# Altium PCB 2MB_RAM_CARD.pcbdoc (part 2 of 2)
Units mil, origin at the board's own origin, x right, y up, seen from the top; angles counter-clockwise.
Board outline 12033.6 x 7458.81 mil, 2 copper layers (Top Layer, Bottom Layer); 77 components, 241 nets, 875 pads, 126 vias.
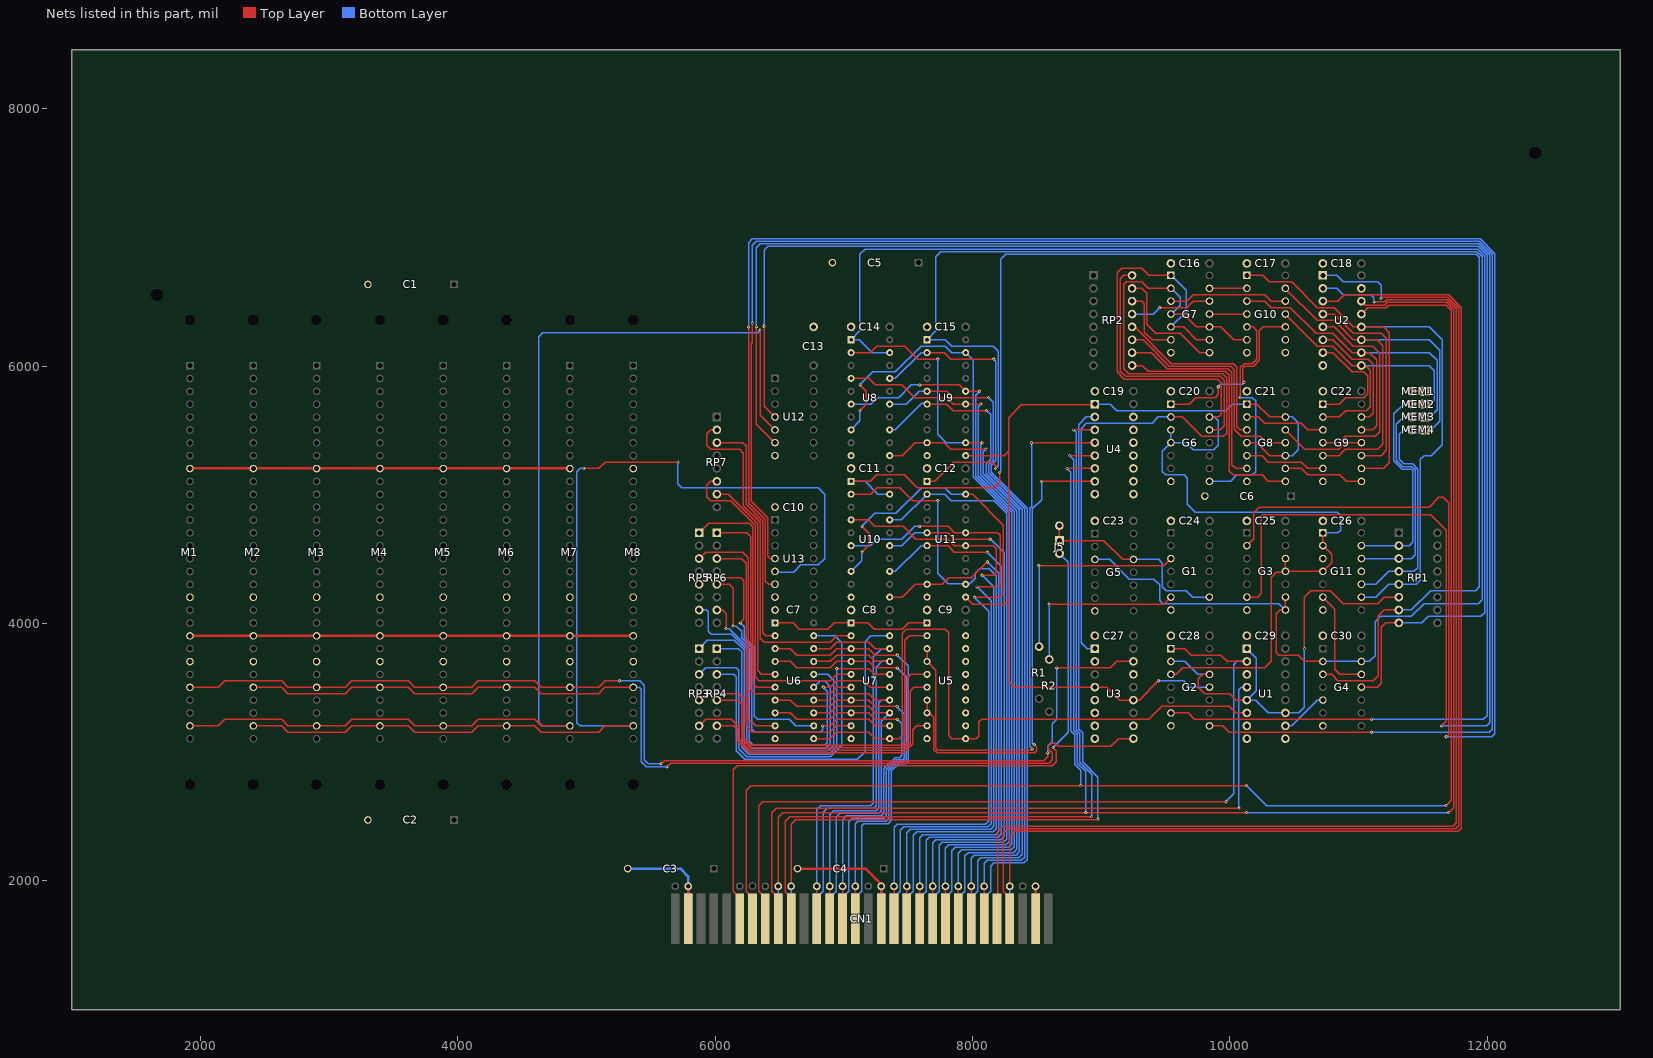
[diagram p2: the nets of this part, all layers, seen from the top]

## Via types
v1: diameter 24, hole 12, Top Layer to Bottom Layer, tented both sides, 126 vias

## Nets (pads, with @x,y where several pads share a name; then routed paths per layer and width w, separated by ;. In a path a pad name is that pad's centre, name@x,y a point inside that pad or via, vN(x,y) a via of type N, cw(c..) or ccw(c..) an arc to the next point about the centre after c; other vN are vias at no path point) (continued)
G7_1: G2.3 G3.11 G3.12 G6.3 G6.4 G6.13 G7.1 G7.5 G7.9 G11.1 G11.2 G11.4 | length 8540.4
  Top Layer w10: G7.5@9541.83,6305.2 9640,6305.19 9740,6205.19 G7.9@9841.83,6205.2 ; G7.1@9541.83,6705.2 9370,6705.19 9315,6760.19 9160,6760.19 9125,6725.19 9125,5955.19 9180,5900.19 9905,5900.19 9935,5870.19 9935,5625.19 9915,5605.19 G6.13@9841.83,5605.2 ; G2.3@9541.8,3605.2 9585,3605.2 9635,3655.2 10270,3655.2 10320,3705.2 10320,4360.19 10360,4400.19 10430.54,4400.19 G3.11@10432.43,4405.2 ; G3.12@10432.43,4498.31 G3.11@10432.43,4405.2 ; G11.1@10722.3,4705.19 G11.2@10722.3,4605.19 10725,4605.19 10790,4540.19 10790,4472.9 G11.4@10722.3,4405.19 10439.32,4405.19 G3.11@10432.43,4405.2
  Bottom Layer w10: G7.5@9541.83,6305.2 9660,6423.4 9660,6590.19 9545,6705.19 G7.1@9541.83,6705.2 ; G6.4@9541.83,5405.2 G6.3@9541.83,5505.2 ; G6.13@9841.83,5605.2 9880,5605.19 9910,5575.19 9910,5385.19 9875,5350.19 9725,5350.19 9715,5350.19 9710,5355.19 9660,5405.19 G6.4@9541.83,5405.2 9475,5338.4 9475,5180.19 9500,5155.19 9645,5155.19 9670,5130.19 9670,4925.19 9730,4865.19 10835,4865.19 10860,4840.19 10860,4725.19 10840,4705.19 G11.1@10722.3,4705.19
G7_2: G6.2 G7.2 G7.4 G7.10 G10.6 U3.1 | length 6276
  Top Layer w10: G6.2@9541.83,5605.2 9630,5605.19 9780,5455.19 9950,5455.19 9975,5480.19 9975,5910.19 9945,5940.19 9215,5940.19 9175,5980.19 9175,6635.19 9195,6655.19 9315,6655.19 9365,6605.19 G7.2@9541.83,6605.2 ; G7.4@9541.83,6405.2 9640,6405.19 9740,6305.19 G7.10@9841.83,6305.2 9930,6305.19 10030,6205.19 G10.6@10131.8,6205.19
  Bottom Layer w10: U3.1@8950.61,3805.23 8889.96,3805.24 8845,3850.2 8845,5515.19 8885,5555.19 9395,5555.19 9445,5605.19 G6.2@9541.83,5605.2 ; G7.4@9541.83,6405.2 9545.03,6405.23 9615,6475.19 9615,6480.19 9615,6535.19 9544.97,6605.23 G7.2@9541.83,6605.2
G7_3: G7.3 G10.12 | length 931.4
  Top Layer w10: G7.3@9541.83,6505.2 9665,6505.19 9715,6555.19 10270,6555.19 10320,6505.19 G10.12@10431.8,6505.19
G7_6: G7.6 RP2.14 | length 554.9
  Top Layer w10: RP2.14@9240.01,6505.23 9315,6505.19 9335,6485.19 9335,6265.19 9395,6205.19 G7.6@9541.83,6205.2
G7_8: G7.8 RP2.15 | length 949.5
  Top Layer w10: RP2.15@9240.01,6605.23 9315,6605.19 9355,6565.19 9355,6325.19 9425,6255.19 9615,6255.19 9765,6105.19 G7.8@9841.83,6105.2
G7_11: G7.11 G10.4 | length 290
  Top Layer w10: G7.11@9841.83,6405.2 G10.4@10131.8,6405.19
G7_12: G7.12 RP2.13 | length 643.2
  Top Layer w10: v1(9455,6455.19) 9665,6455.19 9715,6505.19 G7.12@9841.83,6505.2
  Bottom Layer w10: RP2.13@9240.01,6405.23 9405.04,6405.23 v1(9455,6455.19)
G7_13: G7.13 G10.2 | length 290
  Top Layer w10: G7.13@9841.83,6605.2 G10.2@10131.8,6605.19
G8_2: G8.2 G9.3 | length 632.5
  Top Layer w10: G8.2@10131.8,5605.19 10220,5605.19 10270,5555.19 10555,5555.19 10605,5505.19 G9.3@10722.93,5505.2
G8_3: G8.3 RP2.12 | length 1492.6
  Top Layer w10: RP2.12@9240.01,6305.23 9260,6305.19 9545,6020.19 10025,6020.19 10055,5990.19 10055,5530.19 10080,5505.19 G8.3@10131.8,5505.19
G8_5: G8.5 G9.6 | length 632.5
  Top Layer w10: G8.5@10131.8,5305.19 10250,5305.19 10300,5255.19 10555,5255.19 10605,5205.19 G9.6@10722.93,5205.2
G8_6: G8.6 RP2.10 | length 1683.4
  Top Layer w10: RP2.10@9240.01,6105.23 9390,6105.19 9515,5980.19 9960,5980.19 9985,5980.19 10015,5950.19 10015,5235.19 10045,5205.19 G8.6@10131.8,5205.19
G8_8: G8.8 RP2.9 | length 2001
  Top Layer w10: RP2.9@9240.01,6005.23 9320,6005.19 9365,5960.19 9950,5960.19 9965,5960.19 9995,5930.19 9995,5185.19 10025,5155.19 10250,5155.19 10300,5105.19 G8.8@10431.8,5105.19
G8_9: G8.9 G9.8 | length 632.5
  Top Layer w10: G8.9@10431.8,5205.19 10555,5205.19 10605,5155.19 10855,5155.19 10905,5105.19 G9.8@11022.93,5105.2
G8_11: G8.11 RP2.11 | length 1792.6
  Top Layer w10: RP2.11@9240.01,6205.23 9325,6205.19 9530,6000.19 10005,6000.19 10035,5970.19 10035,5510.19 10090,5455.19 10235,5455.19 10285,5405.19 G8.11@10431.8,5405.19
G8_12: G8.12 G9.11 | length 673.9
  Top Layer w10: G8.12@10431.8,5505.19 10581.8,5355.19 10845,5355.19 10895,5405.19 G9.11@11022.93,5405.2
G8_13: G2.11 G8.1 G8.4 G8.10 G8.13 U3.4 U3.12 U4.1 U9.11 U11.11 | length 7581.6
  Top Layer w10: U11.11@7946.7,4205.19 8001.7,4150.19 8245,4150.19 8280,4185.19 8280,4198.9 ; U9.11@7946.7,5305.19 8245,5305.19 8280,5340.19 8280,5371.69 ; U3.4@8950.61,3505.23 9045,3505.2 9145,3405.2 U3.12@9250.61,3405.23 9295,3405.2 v1(9445,3555.2) ; U3.4@8950.61,3505.23 8324.96,3505.24 8280,3550.2 8280,4030.2 8280,5600.19 8380,5700.19 8945.67,5700.19 U4.1@8950.71,5705.23 ; G8.4@10131.8,5405.19 10210,5405.19 10310,5305.19 G8.10@10431.8,5305.19 ; G8.1@10131.8,5705.19 10210,5705.19 10310,5605.19 G8.13@10431.8,5605.19
  Bottom Layer w10: U4.1@8950.71,5705.23 9069.97,5705.23 9120,5655.19 9970,5655.19 10020,5705.19 G8.1@10131.8,5705.19 ; v1(9445,3555.2) 9640,3555.2 9690,3505.2 G2.11@9841.8,3505.2 ; G8.10@10431.8,5305.19 10485,5305.19 10530,5350.19 10530,5560.19 10485,5605.19 G8.13@10431.8,5605.19
G10_5: G6.8 G10.5 | length 1772.1
  Top Layer w10: v1(10080,5755.19) 10080,5990.19 10110,6020.19 10175,6020.19 10210,6055.19 10210,6275.19 10180,6305.19 G10.5@10131.8,6305.19
  Bottom Layer w10: G6.8@9841.83,5105.2 10005.03,5105.22 10055,5155.19 10175,5155.19 10200,5180.19 10200,5730.19 10175,5755.19 v1(10080,5755.19)
G10_8: G10.8
G10_9: G10.9
G10_10: G6.1 G10.10 | length 1386.9
  Top Layer w10: G6.1@9541.83,5705.2 9685.03,5705.23 9735,5755.19 9885,5755.19 9910,5780.19 v1(9910,5840.19) ; v1(10110,5875.19) 10100,5885.19 10100,5985.19 10115,6000.19 10185,6000.19 10230,6045.19 10230,6275.19 10260,6305.19 G10.10@10431.8,6305.19
  Bottom Layer w10: v1(9910,5840.19) 9930,5860.19 10095,5860.19 v1(10110,5875.19)
G11_3: G11.3
G11_6: G4.12 G11.6 | length 822.3
  Top Layer w10: G11.6@10722.3,4205.19 10815,4112.49 10815,3645.2 10855,3605.2 G4.12@11022.3,3605.2
G11_11: G11.11
GND: C1.2 C2.2 C3.2 C4.2 C5.2 C6.2 C7.1 C8.1 C9.1 C10.1 C11.1 C12.1 C13.1 C14.1 C15.1 C16.1 C17.1 C18.1 C19.1 C20.1 C21.1 C22.1 C23.1 C24.1 C25.1 C26.1 C27.1 C28.1 C29.1 C30.1 CN1.3 CN1.4 CN1.27 CN1.28 CN1.57 CN1.58 G1.7 G2.7 G3.7 G4.7 G5.7 G6.7 G7.7 G8.7 G9.7 G10.7 G11.7 M1.9 M1.22 M2.9 M2.22 M3.9 M3.22 M4.9 M4.22 M5.9 M5.22 M6.9 M6.22 M7.9 M7.22 M8.9 M8.22 pad.13@5789.99,1957.75 pad.13@7289.99,1957.75 pad.13@8489.99,1957.75 U1.3 U1.8 U2.8 U2.15 U3.8 U4.8 U4.15 U5.1 U5.10 U6.1 U6.10 U7.1 U7.10 U8.10 U9.10 U10.10 U11.10 U12.7 U13.7 | length 10466
  Top Layer w10: U6.1@6465.6,4005.2 6605,4005.2 6655,3955.2 6875,3955.2 6925,4005.2 U7.1@7056.2,4005.2 ; U7.1@7056.2,4005.2 7185,4005.2 7235,3955.2 7455,3955.2 7505,4005.2 U5.1@7646.7,4005.2
  Top Layer w19.68: M1.22@1918.4,3905.2 M8.22@5363.3,3905.2 ; M1.9@1918.4,5205.19 M7.9@4871.5,5205.19 ; CN1.58@5789.99,1705.19 pad.13@5789.99,1957.75 ; C4.2@6639.99,2095.2 7170,2095.2 7289.99,1975.2 pad.13@7289.99,1957.75 CN1.28@7289.99,1705.19 ; CN1.4@8489.99,1705.19 pad.13@8489.99,1957.75
  Bottom Layer w19.68: C3.2@5320.7,2095.2 5730,2095.2 5790,2035.19 CN1.57@5789.99,1705.19 ; CN1.27@7289.99,1705.19 pad.13@7289.99,1957.75 ; CN1.3@8489.99,1705.19 pad.13@8489.99,1957.75
J5_1: G1.9 G5.12 J5.1 pad.34 | length 1571.9
  Top Layer w10: pad.34@8675,4760.19 J5.1@8675,4645.19 9020,4645.19 9166.89,4498.31 G5.12@9251.33,4498.31
  Bottom Layer w10: G5.12@9251.33,4498.31 9446.9,4498.3 9475,4470.19 9475,4285.19 9505,4255.19 9660,4255.19 9710,4205.19 G1.9@9841.2,4205.19
J5_2: CN1.50 J5.2 | length 5424.6
  Top Layer w10: CN1.50@6189.99,1705.19 6190,1870.19 6140,1920.19 6140,2865.2 6170,2895.2 8620,2895.2 8650,2925.2 8650,3010.2 v1(8625,3035.2)
  Bottom Layer w10: v1(8625,3035.2) 8745,3155.2 8745,4475.19 J5.2@8675,4545.19
M1_19: M1.19
M1_24: M1.24
M2_19: M2.19
M2_24: M2.24
M3_19: M3.19
M3_24: M3.24
M4_19: M4.19
M4_24: M4.24
M5_19: M5.19
M5_24: M5.24
M6_19: M6.19
M6_24: M6.24
M7_19: M7.19
M7_24: M7.24
M8_19: M8.19
M8_24: M8.24
MEM1_1: MEM1.1 MEM1.2 | length 100
  Top Layer w10: MEM1.2@11416,5805.19 MEM1.1@11516,5805.19
MEM2_2: G11.13 MEM2.2 RP1.2 | length 1681.2
  Bottom Layer w10: G11.13@11022.3,4605.19 RP1.2@11312.91,4605.23 11395,4605.19 11420,4630.19 11420,5190.19 11410,5200.19 11340,5200.19 11275,5265.19 11275,5630.19 11350,5705.19 MEM2.2@11416,5705.19
MEM3_2: G11.12 MEM3.2 RP1.3 | length 1690
  Bottom Layer w10: G11.12@11022.3,4505.19 RP1.3@11312.91,4505.23 11410,4505.19 11440,4535.19 11440,5195.19 11415,5220.19 11345,5220.19 11295,5270.19 11295,5550.19 11350,5605.19 MEM3.2@11416,5605.19
MEM4_2: G11.10 MEM4.2 RP1.4 | length 1743.1
  Bottom Layer w10: G11.10@11022.3,4305.19 11135,4305.19 11235,4405.19 RP1.4@11312.91,4405.23 11430,4405.19 11460,4435.19 11460,5200.19 11420,5240.19 11350,5240.19 11315,5275.19 11315,5470.19 11350,5505.19 MEM4.2@11416,5505.19
PIL: M2.29 M4.29 M6.29 M8.29 U13.5 | length 9040.4
  Top Layer w10: M2.29@2410.48,3204.99 2630.18,3204.99 2679.98,3155.19 3124.98,3155.19 3174.98,3205.19 M4.29@3394.78,3204.99 ; M4.29@3394.73,3204.99 3614.43,3204.99 3664.23,3155.19 4109.23,3155.19 4159.23,3205.19 M6.29@4379.03,3204.99 ; M6.29@4378.98,3204.99 4598.68,3204.99 4648.48,3155.19 5093.48,3155.19 5143.48,3205.19 M8.29@5363.28,3204.99 ; v1(4980,5205.19) 5095,5205.19 5145,5255.19 v1(5710,5255.19) 5235,5255.19
  Bottom Layer w10: v1(4980,5205.19) 4950,5205.19 4925,5180.19 4925,3230.2 4950.2,3204.99 M8.29@5363.3,3204.99 ; v1(5710,5255.19) 5710,5085.19 5740,5055.19 6800,5055.19 6850,5005.19 6850,4505.19 6800,4455.19 6665,4455.19 6610,4400.19 6470,4400.19 U13.5@6465,4405.19
PIU: M1.29 M3.29 M5.29 M7.29 U12.5 | length 8891.7
  Top Layer w10: M1.29@1918.4,3204.99 2140,3205.2 2190,3255.2 2269.2,3255.2 2630,3255.2 2680,3205.2 M3.29@2902.6,3204.99 ; M3.29@2902.65,3204.99 3124.25,3205.2 3174.25,3255.2 3253.45,3255.2 3614.25,3255.2 3664.25,3205.2 M5.29@3886.85,3204.99 ; M5.29@3886.9,3204.99 4108.5,3205.2 4158.5,3255.2 4237.7,3255.2 4598.5,3255.2 4648.5,3205.2 M7.29@4871.1,3204.99 ; v1(6350,6280.19) 6350,5620.19 U12.5@6465,5505.19
  Bottom Layer w10: M7.29@4871.1,3204.99 4655.2,3204.99 4630,3230.2 4630,6230.19 4660,6260.19 6330,6260.19 v1(6350,6280.19)
POL: M2.26 M4.26 M6.26 M8.26 U3.9 | length 7767.7
  Top Layer w10: M2.26@2410.48,3504.99 2630.18,3504.99 2679.98,3455.19 3124.98,3455.19 3174.98,3505.19 M4.26@3394.78,3504.99 ; M4.26@3394.73,3504.99 3614.43,3504.99 3664.23,3455.19 4109.23,3455.19 4159.23,3505.19 M6.26@4379.03,3504.99 ; M6.26@4378.98,3504.99 4598.68,3504.99 4648.48,3455.19 5093.48,3455.19 5143.48,3505.19 M8.26@5363.28,3504.99 ; v1(5625,2885.2) 5655,2915.2 8595,2915.2 8620,2940.2 8620,2995.2 8590,3025.2 8590,3045.2 8615,3070.2 8640,3070.2 8665,3045.2 9075,3045.2 9135,3105.2 U3.9@9250.61,3105.23
  Bottom Layer w10: M8.26@5363.3,3504.99 5410.2,3504.99 5425,3490.2 5425,2925.2 5465,2885.2 v1(5625,2885.2)
POU: M1.26 M3.26 M5.26 M7.26 U3.15 | length 8776.5
  Top Layer w10: M1.26@1918.38,3504.99 2139.98,3505.19 2189.98,3555.19 2629.98,3555.19 2679.98,3505.19 M3.26@2902.58,3504.99 ; M3.26@2902.63,3504.99 3124.23,3505.19 3174.23,3555.19 3614.23,3555.19 3664.23,3505.19 M5.26@3886.83,3504.99 ; M5.26@3886.88,3504.99 4108.48,3505.19 4158.48,3555.19 4598.48,3555.19 4648.48,3505.19 4871.08,3504.99 5095,3505.2 5145,3555.2 v1(5255,3555.2) ; v1(5580,2910.2) 5605,2935.2 8555,2935.2 8585,2965.2 v1(8585,2995.2) ; v1(8655,3655.2) 9070,3655.2 9120,3705.2 U3.15@9250.61,3705.23
  Bottom Layer w10: v1(5255,3555.2) 5415,3555.2 5450,3520.2 5450,2940.2 5480,2910.2 v1(5580,2910.2) ; v1(8585,2995.2) 8585,3045.2 8620,3080.2 8620,3220.2 8655,3255.2 v1(8655,3655.2)
R1_2: G1.3 R1.2 | length 1679.5
  Top Layer w10: v1(8515,4450.19) 9486.2,4450.19 G1.3@9541.2,4505.19
  Bottom Layer w10: v1(8515,4450.19) 8517.55,4447.65 R1.2@8517.55,3820.75
R2_2: G1.6 R2.2 | length 1399
  Top Layer w10: v1(8595,4150.19) 9486.2,4150.19 G1.6@9541.2,4205.19
  Bottom Layer w10: v1(8595,4150.19) 8596.29,4148.9 R2.2@8596.29,3720.75
RP1_6: G2.2 G2.12 RP1.6 U1.1 U1.5 U1.11 | length 3565.6
  Top Layer w10: G2.12@9841.8,3605.2 9790,3605.2 9755,3570.2 9755,3505.2 9805,3455.2 10000,3455.2 10050,3405.2 U1.5@10131.81,3405.23 ; v1(10580,3805.2) 10580,4205.19 10630,4255.19 10685,4255.19 10780,4255.19 10880,4155.19 11150,4155.19 11200,4205.19 RP1.6@11312.91,4205.23
  Bottom Layer w10: G2.2@9541.8,3705.2 9650,3705.2 9750,3605.2 G2.12@9841.8,3605.2 ; U1.1@10131.81,3805.23 10205,3731.99 10205,3478.39 U1.5@10131.81,3405.23 10200,3405.2 10300,3305.2 U1.11@10431.81,3305.23 10535,3305.2 10580,3350.2 v1(10580,3805.2)
RP2_16: G6.12 RP2.16 | length 2135
  Top Layer w10: RP2.16@9240.01,6705.23 9175,6705.19 9150,6680.19 9150,5960.19 9190,5920.19 9925,5920.19 9955,5890.19 9955,5535.19 9925,5505.19 G6.12@9841.83,5505.2
S$50070: 
S$50074: 
S$50081: 
S$50085: 
S$50089: 
S$50093: 
S$50097: 
S$50101: 
S$50109: 
S$54663: 
S$54667: 
S$107285: 
S$951400: 
S$951404: 
S$951425: 
S$951429: 
S$951433: 
S$951437: 
S$951441: 
S$1069934: 
S$1070163: 
S$1070305: 
U1_2: CN1.46 G2.1 U1.2 | length 6376.5
  Top Layer w10: CN1.46@6389.99,1705.19 6390,1870.19 6340,1920.19 6340,2585.2 6370,2615.2 v1(9970,2615.2) ; G2.1@9541.8,3805.2 9650,3805.2 9700,3755.2 9930,3755.2 9979.96,3705.24 U1.2@10131.81,3705.23
  Bottom Layer w10: v1(9970,2615.2) 10030,2675.2 10030,2920.2 10030,3680.2 10055,3705.2 U1.2@10131.81,3705.23
U1_4: CN1.44 U1.4 | length 5480.3
  Top Layer w10: CN1.44@6489.99,1705.19 6489.99,1870.2 6440,1920.19 6440,2215.2 6440,2490.2 6440,2530.2 6475,2565.2 6850,2565.2 v1(10070,2565.2)
  Bottom Layer w10: v1(10070,2565.2) 10070,3485.2 10090.04,3505.23 U1.4@10131.81,3505.23
U1_7: U1.7
U1_9: U1.9
U1_10: G4.5 U1.10 | length 373.3
  Bottom Layer w10: U1.10@10431.81,3205.23 10480,3205.2 10680,3405.2 G4.5@10722.3,3405.2
U2_1: CN1.8 U2.1 | length 9503.7
  Top Layer w10: CN1.8@8289.99,1705.19 8290,1870.19 8240,1920.19 8240,2370.2 8275,2405.2 11755,2405.2 11780,2430.2 11780,6450.19 11695,6535.19 11185,6535.19 v1(11175,6525.19)
  Bottom Layer w10: U2.1@10722.31,6705.23 10830,6705.19 10880,6655.19 11150,6655.19 11175,6630.19 11175,6585.19 v1(11175,6525.19)
U2_2: CN1.10 U2.2 | length 9403
  Top Layer w10: CN1.10@8189.99,1705.19 8195,1710.19 8195,2385.2 8235,2425.2 11725,2425.2 11735,2425.2 11760,2450.2 11760,6445.19 11690,6515.19 11220,6515.19 11205,6500.19 v1(11120,6500.19)
  Bottom Layer w10: U2.2@10722.31,6605.23 10830,6605.19 10880,6555.19 11095,6555.19 11120,6530.19 v1(11120,6500.19)
U2_3: CN1.7 pad.32 U2.3 | length 9361.8
  Top Layer w10: pad.32@8290,1957.75 8290,2345.2 8330,2385.2 11775,2385.2 11800,2410.2 11800,6455.19 11700,6555.19 10890,6555.19 10840,6505.19 U2.3@10722.31,6505.23
  Bottom Layer w10: CN1.7@8289.99,1705.19 pad.32@8290,1957.75
U2_4: G9.10 U2.4 | length 1650.1
  Top Layer w10: U2.4@10722.31,6405.23 10810,6405.19 10960,6255.19 11175,6255.19 11215,6215.19 11215,5345.19 11175,5305.19 G9.10@11022.93,5305.2
U2_5: G9.4 U2.5 | length 1614.9
  Top Layer w10: U2.5@10722.31,6305.23 10810,6305.19 10960,6155.19 11110,6155.19 11165,6100.19 11165,5490.19 11130,5455.19 10895,5455.19 10845,5405.19 G9.4@10722.93,5405.2
U2_6: G9.13 U2.6 | length 955.9
  Top Layer w10: U2.6@10722.31,6205.23 10800,6205.19 10950,6055.19 11075,6055.19 11115,6015.19 11115,5635.19 11085,5605.19 G9.13@11022.93,5605.2
U2_7: G9.1 U2.7 | length 942.5
  Top Layer w10: U2.7@10722.31,6105.23 10800,6105.19 10950,5955.19 11040,5955.19 11070,5925.19 11070,5785.19 11040,5755.19 10900,5755.19 10850,5705.19 G9.1@10722.93,5705.2
U2_9: G9.2 G10.11 MEM2.1 U2.9 | length 2425.4
  Top Layer w10: G10.11@10431.8,6405.19 10431.8,6403.4 10680,6155.19 10800,6155.19 10950,6005.19 U2.9@11022.31,6005.23 11055,6005.19 11090,5970.19 11090,5685.19 11060,5655.19 10900,5655.19 10850,5605.19 G9.2@10722.93,5605.2
  Bottom Layer w10: U2.9@11022.31,6005.23 11549.96,6005.23 11590,5965.19 11590,5735.19 11560,5705.19 MEM2.1@11516,5705.19
U2_10: G9.12 G10.3 MEM3.1 U2.10 | length 2955.5
  Top Layer w10: G10.3@10131.8,6505.19 10270,6505.19 10320,6455.19 10470,6455.19 10670,6255.19 10800,6255.19 10950,6105.19 U2.10@11022.31,6105.23 11085,6105.19 11140,6050.19 11140,5535.19 11110,5505.19 G9.12@11022.93,5505.2
  Bottom Layer w10: U2.10@11022.31,6105.23 11550,6105.19 11610,6045.19 11610,5660.19 11555,5605.19 MEM3.1@11516,5605.19
U2_11: G9.5 G10.13 MEM4.1 U2.11 | length 3549.7
  Top Layer w10: G10.13@10431.8,6605.19 10431.8,6603.4 10680,6355.19 10810,6355.19 10959.96,6205.23 U2.11@11022.31,6205.23 ; G9.5@10722.93,5305.2 10845,5305.19 10895,5355.19 11150,5355.19 11190,5395.19 11190,6160.19 11145,6205.19 U2.11@11022.31,6205.23
  Bottom Layer w10: U2.11@11022.31,6205.23 11550,6205.19 11630,6125.19 11630,5570.19 11565,5505.19 MEM4.1@11516,5505.19
U2_12: G9.9 G10.1 G11.9 RP1.5 U2.12 | length 5691.6
  Top Layer w10: G10.1@10131.8,6705.19 10255,6705.19 10305,6655.19 10480,6655.19 10680,6455.19 10810,6455.19 10960,6305.19 U2.12@11022.31,6305.23 11195,6305.19 11240,6260.19 11240,5250.19 11195,5205.19 G9.9@11022.93,5205.2
  Bottom Layer w10: G11.9@11022.3,4205.19 11135,4205.19 11235,4305.19 RP1.5@11312.91,4305.23 11450,4305.19 11480,4335.19 11480,5275.19 11510,5305.19 11565,5305.19 11650,5390.19 11650,6205.19 11550,6305.19 U2.12@11022.31,6305.23
U3_2: U3.2
U3_5: U3.5
U3_6: U3.6
U3_7: U3.7
U3_10: U3.10
U3_14: U3.14
U4_2: CN1.41 pad.11 U4.2 | length 6414.3
  Top Layer w10: pad.11@6590,1957.75 6590,1998.89 6590,2440.2 6625,2475.2 8970,2475.2 v1(8975,2480.2)
  Bottom Layer w10: CN1.41@6589.99,1705.19 pad.11@6590,1957.75 ; U4.2@8950.71,5605.23 8885,5605.19 8825,5545.19 8825,3290.2 8825,3180.2 8855,3150.2 8855,2925.2 8975,2805.2 v1(8975,2480.2)
U4_3: CN1.42 U4.3 | length 6401.9
  Top Layer w10: CN1.42@6589.99,1705.19 6590,1870.19 6545,1915.19 6545,2010.19 6545,2465.2 6580,2500.2 v1(8925,2500.2) ; v1(8785,5505.19) U4.3@8950.71,5505.23 U4.3@8950.71,5505.23
  Bottom Layer w10: v1(8785,5505.19) 8805,5485.19 8805,3175.2 8835,3145.2 8835,2920.2 8925,2830.2 v1(8925,2500.2)
U4_4: U4.4 U5.3 U5.4 | length 4451.1
  Top Layer w10: U5.3@7646.7,3805.2 U5.4@7646.7,3705.2 7716.1,3635.8 7716.1,3029.09 7731.7,3013.49 8453.3,3013.49 v1(8465,3025.2) ; v1(8458.59,5405.23) U4.4@8950.71,5405.23
  Bottom Layer w10: v1(8458.59,5405.23) 8458.6,4908.8 8445,4895.19 8445,3045.2 v1(8465,3025.2)
U4_5: CN1.43 pad.10 U2.14 U4.5 | length 13726.4
  Top Layer w10: pad.10@6490,1957.75 6490,2025.19 6490,2495.2 6525,2530.2 v1(8880,2530.2) v1(10130,2530.2) ; v1(8753.86,5305.23) U4.5@8950.71,5305.23 ; U2.14@11022.31,6505.23 11052.3,6475.19 11205,6475.19 11225,6495.19 11685,6495.19 11740,6440.19 11740,2570.2 v1(11700,2530.2)
  Bottom Layer w10: CN1.43@6489.99,1705.19 pad.10@6490,1957.75 ; v1(8753.86,5305.23) 8785,5274.1 8785,5265.19 8785,3170.2 8815,3140.2 8815,2950.2 8815,2915.2 8880,2850.2 v1(8880,2530.2) ; v1(10130,2530.2) v1(11700,2530.2)
U4_6: CN1.48 U2.13 U4.6 | length 13874.3
  Top Layer w10: CN1.48@6289.99,1705.19 6290,1870.19 6240,1920.19 6240,2705.2 6275,2740.2 v1(8839.29,2740.2) v1(10130,2740.2) ; v1(8734.18,5205.23) U4.6@8950.71,5205.23 ; U2.13@11022.31,6405.23 11072.3,6455.19 11215,6455.19 11235,6475.19 11630,6475.19 11680,6475.19 11720,6435.19 11720,2625.2 v1(11680,2585.2)
  Bottom Layer w10: v1(8734.18,5205.23) 8765,5174.4 8765,3165.2 8795,3135.2 8795,3127.3 8795,3100.2 8795,2905.2 8839.3,2860.89 v1(8839.29,2740.2) ; v1(10130,2740.2) 10285,2585.2 v1(11680,2585.2)
U4_7: U4.7 U5.7 U5.8 | length 3787.2
  Top Layer w10: U5.7@7646.7,3405.2 U5.8@7646.7,3305.2 7665,3305.2 7700,3270.2 7700,3020.2 7725,2995.2 8485,2995.2 8500,3010.2 8500,3040.2 v1(8480,3060.2) ; v1(8537.33,5105.23) U4.7@8950.71,5105.23
  Bottom Layer w10: v1(8480,3060.2) 8465,3075.2 8465,4890.19 8537.3,4962.49 v1(8537.33,5105.23)
U4_9: U4.9
U4_10: U4.10
U4_11: U4.11
U4_12: U4.12
U4_13: U4.13
U4_14: U4.14
U5_2: RP3.5 U5.2 | length 2951.5
  Top Layer w10: RP3.5@5875.11,3405.23 5925,3455.2 6185,3455.2 6223.9,3416.3 6223.9,3111.3 6280,3055.2 7450,3055.2 7475,3080.2 7475,3870.2 7510,3905.2 U5.2@7646.7,3905.2
U5_5: RP4.5 U5.5 | length 2477.1
  Top Layer w10: RP4.5@6012.91,3405.23 6175,3405.2 6205,3375.2 6205,3105.2 6275,3035.2 7455,3035.2 7495,3075.2 7495,3580.2 7520,3605.2 U5.5@7646.7,3605.2
U5_6: RP3.7 U5.6 | length 2387.6
  Top Layer w10: RP3.7@5875.11,3205.23 5925,3255.2 6125,3255.2 6188.9,3191.3 6188.9,3096.3 6270,3015.2 7460,3015.2 7515,3070.2 7515,3475.2 7545,3505.2 U5.6@7646.7,3505.2
U5_9: RP4.7 U5.9 | length 1924.9
  Top Layer w10: RP4.7@6012.91,3205.23 6145,3205.2 6172.8,3177.39 6172.8,3087.39 6265,2995.2 7465,2995.2 7535,3065.2 7535,3175.2 7565,3205.2 U5.9@7646.7,3205.2
U5_12: U5.12
U5_13: U5.13
U5_14: U5.14
U5_15: U5.15
U5_16: U5.16
U5_17: U5.17
U5_18: U5.18
U5_19: U5.19
U6_2: RP7.3 U6.2 | length 1847.3
  Top Layer w10: RP7.3@6012.91,5405.23 6215,5405.19 6240,5380.19 6240,4925.19 6370,4795.19 6370,3930.2 6395,3905.2 U6.2@6465.6,3905.2
U6_3: CN1.31 U6.3 U7.3 | length 3410.1
  Top Layer w10: U6.3@6465.6,3805.2 6585,3805.2 6635,3755.2 6895,3755.2 6945,3805.2 U7.3@7056.2,3805.2 7195,3805.2 7245,3755.2 v1(7415,3755.2)
  Bottom Layer w10: CN1.31@7089.99,1705.19 7090,1870.19 7140,1920.19 7140,2430.2 7155,2445.2 7345,2445.2 7370,2470.2 7370,2855.2 7425,2910.2 7480,2910.2 7500,2930.2 7500,3670.2 v1(7415,3755.2)
U6_4: CN1.32 pad.16 U6.4 U7.4 | length 3311.4
  Top Layer w10: U6.4@6465.6,3705.2 6585,3705.2 6635,3655.2 6895,3655.2 6945,3705.2 U7.4@7056.2,3705.2 7195,3705.2 7245,3655.2 v1(7415,3655.2) ; CN1.32@7089.99,1705.19 pad.16@7090,1957.75
  Bottom Layer w10: pad.16@7090,1957.75 7090,2445.2 7110,2465.2 7330,2465.2 7350,2485.2 7350,2860.2 7416.1,2926.3 7466.1,2926.3 7483.9,2944.09 7483.9,3586.3 v1(7415,3655.2)
U6_5: RP7.7 U6.5 | length 1700.4
  Top Layer w10: RP7.7@6012.91,5005.23 6100,5005.19 6330,4775.19 6330,3635.2 6360,3605.2 U6.5@6465.6,3605.2
U6_6: RP5.1 U6.6 | length 1861.4
  Top Layer w10: RP5.1@5875.11,4705.23 5950,4780.19 6265,4780.19 6293.9,4751.3 6293.9,3536.3 6325,3505.2 U6.6@6465.6,3505.2
U6_7: CN1.33 U6.7 U7.7 | length 3054.1
  Top Layer w10: U6.7@6465.6,3405.2 6585,3405.2 6635,3355.2 6895,3355.2 6945,3405.2 U7.7@7056.2,3405.2 7195,3405.2 7245,3355.2 v1(7415,3355.2)
  Bottom Layer w10: CN1.33@6989.99,1705.19 6990,1870.19 7040,1920.19 7040,2460.2 7065,2485.2 7310,2485.2 7330,2505.2 7330,2865.2 7407.2,2942.39 7457.2,2942.39 7467.8,2952.99 7467.8,3297.39 7415,3350.2 v1(7415,3355.2)
U6_8: CN1.34 pad.15 U6.8 U7.8 | length 2945.2
  Top Layer w10: U6.8@6465.6,3305.2 6585,3305.2 6635,3255.2 6895,3255.2 6945,3305.2 U7.8@7056.2,3305.2 7195,3305.2 7245,3255.2 v1(7415,3255.2) ; CN1.34@6989.99,1705.19 pad.15@6990,1957.75
  Bottom Layer w10: pad.15@6990,1957.75 6990,2475.2 7020,2505.2 7290,2505.2 7310,2525.2 7310,2870.2 7398.3,2958.49 7433.3,2958.49 7450,2975.2 7450,3220.2 v1(7415,3255.2)
U6_9: RP5.3 U6.9 | length 1902.7
  Top Layer w10: RP5.3@5875.11,4505.23 5925,4555.19 6215,4555.19 6258.9,4511.3 6258.9,3261.3 6315,3205.2 U6.9@6465.6,3205.2
U6_11: U1.6 U5.11 U6.11 U7.11 | length 5234.8
  Top Layer w10: U6.11@6765.6,3105.2 6890,3105.2 6940,3155.2 7195,3155.2 7245,3105.2 U7.11@7356.2,3105.2 7430,3105.2 7455,3130.2 7455,3925.2 7485,3955.2 7790,3955.2 7815,3930.2 7815,3630.2 7815,3130.2 7840,3105.2 U5.11@7946.7,3105.2 8030,3105.2 8050,3125.2 8050,3235.2 8070,3255.2 9370,3255.2 9470,3355.2 9995,3355.2 10045,3305.2 U1.6@10131.81,3305.23
U6_12: RP5.5 U6.12 | length 1979.7
  Top Layer w10: RP5.5@5875.11,4305.23 5925,4355.19 6200,4355.19 6223.9,4331.3 6223.9,4034.09 v1(6195,4005.2)
  Bottom Layer w10: v1(6195,4005.2) 6225,3975.2 6225,3895.2 6305,3815.2 6305,3280.2 6330,3255.2 6575,3255.2 6625,3205.2 U6.12@6765.6,3205.2
U6_13: CN1.35 U6.13 U7.13 | length 2600.8
  Top Layer w10: U6.13@6765.6,3305.2 6895,3305.2 6945,3355.2 7195,3355.2 7245,3305.2 U7.13@7356.2,3305.2
  Bottom Layer w10: CN1.35@6889.99,1705.19 6890,1870.19 6940,1920.19 6940,2495.2 6970,2525.2 7270,2525.2 7290,2545.2 7290,3238.99 U7.13@7356.2,3305.2
U6_14: CN1.36 pad.14 U6.14 U7.14 | length 2757.2
  Top Layer w10: U6.14@6765.6,3405.2 6895,3405.2 6945,3455.2 7195,3455.2 7245,3405.2 U7.14@7356.2,3405.2 ; CN1.36@6889.99,1705.19 pad.14@6890,1957.75
  Bottom Layer w10: pad.14@6890,1957.75 6890,2515.2 6920,2545.2 7250,2545.2 7270,2565.2 7270,3385.2 7290,3405.2 U7.14@7356.2,3405.2
U6_15: RP5.7 U6.15 | length 2608.9
  Bottom Layer w10: RP5.7@5875.11,4105.23 5930,4105.19 5945,4090.2 5945,3940.2 5970,3915.2 6130,3915.2 6245,3800.2 6245,3070.2 6285,3030.2 6860,3030.2 6895,3065.2 6895,3510.2 6850,3555.2 6815.6,3555.2 U6.15@6765.6,3505.2
U6_16: RP3.1 U6.16 | length 2558.2
  Bottom Layer w10: RP3.1@5875.11,3805.23 5940,3870.2 6150,3870.2 6225,3795.2 6225,3055.2 6270,3010.2 6875,3010.2 6920,3055.2 6920,3560.2 6875,3605.2 U6.16@6765.6,3605.2
U6_17: CN1.37 U6.17 U7.17 | length 3117.4
  Top Layer w10: U6.17@6765.6,3705.2 6895,3705.2 6945,3755.2 7195,3755.2 7245,3705.2 U7.17@7356.2,3705.2
  Bottom Layer w10: CN1.37@6789.99,1705.19 6790,1870.19 6840,1920.19 6840,2535.2 6870,2565.2 7230,2565.2 7250,2585.2 7250,3660.2 7300,3710.2 7351.2,3710.2 U7.17@7356.2,3705.2
U6_18: CN1.38 pad.13@6790,1957.75 U6.18 U7.18 | length 3230.8
  Top Layer w10: U6.18@6765.6,3805.2 6895,3805.2 6945,3855.2 7195,3855.2 7245,3805.2 U7.18@7356.2,3805.2 ; CN1.38@6789.99,1705.19 pad.13@6790,1957.75
  Bottom Layer w10: pad.13@6790,1957.75 6790,2555.2 6820,2585.2 7210,2585.2 7230,2605.2 7230,3740.2 7295,3805.2 U7.18@7356.2,3805.2
U6_19: RP3.3 U6.19 | length 2848.2
  Bottom Layer w10: RP3.3@5875.11,3605.23 5925,3655.2 6165,3655.2 6185,3635.2 6185,3025.2 6245,2965.2 6895,2965.2 6985,3055.2 6985,3850.2 6930,3905.2 U6.19@6765.6,3905.2
U7_2: RP7.2 U7.2 | length 2723.4
  Top Layer w10: RP7.2@6012.91,5505.23 5965,5505.19 5935,5475.19 5935,5385.19 5965,5355.19 6190,5355.19 6220,5325.19 6220,4915.19 6350,4785.19 6350,3885.2 6380,3855.2 6895,3855.2 6945,3905.2 U7.2@7056.2,3905.2
U7_5: RP7.6 U7.5 | length 2605.8
  Top Layer w10: RP7.6@6012.91,5105.23 5965,5105.19 5935,5075.19 5935,4985.19 5965,4955.19 6120,4955.19 6310,4765.19 6310,3585.2 6340,3555.2 6895,3555.2 6945,3605.2 U7.5@7056.2,3605.2
U7_6: RP6.1 U7.6 | length 2275.9
  Top Layer w10: RP6.1@6012.91,4705.23 6245,4705.19 6275,4675.19 6275,3490.2 6310,3455.2 6895,3455.2 6945,3505.2 U7.6@7056.2,3505.2
U7_9: RP6.3 U7.9 | length 2364.2
  Top Layer w10: RP6.3@6012.91,4505.23 6205,4505.19 6240,4470.19 6240,3205.2 6290,3155.2 6890,3155.2 6940,3205.2 U7.9@7056.2,3205.2
U7_12: RP6.5 U7.12 | length 2470.5
  Top Layer w10: RP6.5@6012.91,4305.23 6109.97,4305.22 6140,4275.19 v1(6140,3980.2) ; v1(6835,3205.2) 6895,3205.2 6945,3255.2 7195,3255.2 7245,3205.2 U7.12@7356.2,3205.2
  Bottom Layer w10: v1(6140,3980.2) 6165,3980.2 6205,3940.2 6205,3890.2 6285,3810.2 6285,3180.2 6310,3155.2 6815,3155.2 6835,3175.2 v1(6835,3205.2)
U7_15: RP6.7 U7.15 | length 2789.5
  Top Layer w10: RP6.7@6012.91,4105.23 6055,4105.23 6085,4075.2 v1(6085,3960.2) ; v1(6840,3505.2) 6895,3505.2 6945,3555.2 7155,3555.2 7205,3505.2 U7.15@7356.2,3505.2
  Bottom Layer w10: v1(6085,3960.2) 6110,3960.2 6265,3805.2 6265,3085.2 6295,3055.2 6850,3055.2 6870,3075.2 6870,3475.2 v1(6840,3505.2)
U7_16: RP4.1 U7.16 | length 2764.9
  Top Layer w10: v1(6945,3650.2) 7195,3650.2 7240,3605.2 U7.16@7356.2,3605.2
  Bottom Layer w10: RP4.1@6012.91,3805.23 6180,3805.2 6205,3780.2 6205,3040.2 6260,2985.2 6885,2985.2 6945,3045.2 v1(6945,3650.2)
U7_19: RP4.3 U7.19 | length 2852
  Bottom Layer w10: RP4.3@6012.91,3605.23 6145,3605.2 6165,3585.2 6165,3010.2 6230,2945.2 7105,2945.2 7165,3005.2 7165,3860.2 7210,3905.2 U7.19@7356.2,3905.2
U8_1: G4.11 RP1.8 U8.1 U8.19 | length 10152
  Top Layer w10: G4.11@11022.3,3505.2 11145,3505.2 11175,3535.2 11175,3970.2 11210,4005.2 RP1.8@11312.91,4005.23
  Bottom Layer w10: U8.19@7356.2,6105.19 7220,6105.19 7120,6205.19 U8.1@7056.2,6205.19 7125,6273.99 7125,6870.19 7165,6910.19 11925,6910.19 11980,6855.19 11980,4220.19 11980,4085.2 11950,4055.2 11540,4055.2 11490,4005.2 RP1.8@11312.91,4005.23
U9_2: CN1.11 U8.17 U9.2 | length 5675.5
  Top Layer w10: U9.2@7646.7,6105.19 7780,6105.19 7830,6055.19 7860,6055.19 v1(8165,6055.19)
  Bottom Layer w10: U8.17@7356.2,5905.19 7400,5905.19 7600,6105.19 U9.2@7646.7,6105.19 ; CN1.11@8089.99,1705.19 8090,1870.19 8140,1920.19 8140,1935.19 8140,2010.19 8140,2115.2 8165,2140.2 8400,2140.2 8425,2165.2 8425,4895.19 8145,5175.19 8145,5230.19 8180,5265.19 8180,6040.19 v1(8165,6055.19)
U9_5: CN1.12 pad.30 U8.15 U9.5 | length 5311.6
  Top Layer w10: U9.5@7646.7,5805.19 7800,5805.19 7850,5755.19 v1(8125,5755.19) ; CN1.12@8089.99,1705.19 pad.30@8090,1957.75
  Bottom Layer w10: U8.15@7356.2,5705.19 7485,5705.19 7585,5805.19 U9.5@7646.7,5805.19 ; pad.30@8090,1957.75 8090,2135.2 8115,2160.2 8195,2160.2 8380,2160.2 8405,2185.2 8405,4892.49 8125,5172.49 8125,5235.19 8160,5270.19 8160,5720.19 v1(8125,5755.19)
U9_6: CN1.13 U8.13 U9.6 | length 5290.8
  Top Layer w10: U9.6@7646.7,5705.19 7800.01,5705.19 7850,5655.19 7865,5655.19 v1(8110,5655.19)
  Bottom Layer w10: U8.13@7356.2,5505.19 7400,5505.19 7605,5710.19 7641.7,5710.19 U9.6@7646.7,5705.19 ; CN1.13@7989.99,1705.19 7990,1870.19 8040,1920.19 8040,1930.19 8040,1995.19 8040,2155.2 8065,2180.2 8360,2180.2 8385,2205.2 8385,4885.19 8105,5165.19 8105,5240.19 8140,5275.19 8140,5625.19 v1(8110,5655.19)
U9_9: CN1.14 pad.29 U8.11 U9.9 | length 4930.9
  Top Layer w10: U8.11@7356.2,5305.19 7455,5305.19 7555,5405.19 U9.9@7646.7,5405.19 7780.01,5405.19 7830,5355.19 v1(8105,5355.19) ; CN1.14@7989.99,1705.19 pad.29@7990,1957.75
  Bottom Layer w10: pad.29@7990,1957.75 7990,2175.2 8015,2200.2 8340,2200.2 8365,2225.2 8365,4882.49 8267.3,4980.19 8085,5162.49 8085,5335.19 v1(8105,5355.19)
U9_12: CN1.15 U8.2 U9.12 | length 5909.4
  Top Layer w10: U8.2@7056.2,6105.19 7205,6105.19 7255,6155.19 7475,6155.19 7575,6055.19 v1(7730,6055.19) ; U9.12@7946.7,5405.19 v1(8075,5405.19)
  Bottom Layer w10: v1(7730,6055.19) 7730,5470.19 7795.01,5405.19 U9.12@7946.7,5405.19 ; CN1.15@7889.99,1705.19 7890,1870.19 7940,1920.19 7940,1950.19 7940,2020.19 7940,2195.2 7965,2220.2 8320,2220.2 8345,2245.2 8345,4875.19 8065,5155.19 8065,5395.19 v1(8075,5405.19)
U9_15: CN1.16 pad.28 U8.4 U9.15 | length 5621.6
  Top Layer w10: U8.4@7056.2,5905.19 7195,5905.19 7245,5855.19 7450,5855.19 7550,5755.19 7800,5755.19 7850,5705.19 U9.15@7946.7,5705.19 v1(8065,5705.19) ; CN1.16@7889.99,1705.19 pad.28@7890,1957.75
  Bottom Layer w10: pad.28@7890,1957.75 7890,2215.2 7915,2240.2 8300,2240.2 8325,2265.2 8325,2770.2 8325,4870.19 8045,5150.19 8045,5685.19 v1(8065,5705.19)
U9_16: CN1.17 U8.6 U9.16 | length 5770.3
  Top Layer w10: v1(7590,5855.19) 7895,5855.19 ; 7891.18,5855.19 7896.71,5855.19 U9.16@7946.7,5805.19 v1(8055,5805.19)
  Bottom Layer w10: U8.6@7056.2,5705.19 7210,5705.19 7260,5755.19 7425,5755.19 7525,5855.19 v1(7590,5855.19) ; CN1.17@7789.99,1705.19 7790,1870.19 7840,1920.19 7840,1950.19 7840,2015.19 7840,2235.2 7865,2260.2 8280,2260.2 8305,2285.2 8305,4865.19 8025,5145.19 8025,5775.19 v1(8055,5805.19)
U9_19: CN1.18 pad.27 U8.8 U9.19 | length 6392.4
  Top Layer w10: v1(7125,5655.19) 7175,5705.19 7175,5765.19 7175,5805.19 v1(7125,5855.19) ; CN1.18@7789.99,1705.19 pad.27@7790,1957.75
  Bottom Layer w10: U8.8@7056.2,5505.19 7125,5573.99 v1(7125,5655.19) ; v1(7125,5855.19) 7225,5955.19 7400,5955.19 7600,6155.19 7605,6155.19 7790,6155.19 7840,6105.19 U9.19@7946.7,6105.19 8005,6046.9 8005,6040.19 8005,5140.19 8285,4860.19 8285,2413.09 8285,2305.2 8260,2280.2 7815,2280.2 7790,2255.2 pad.27@7790,1957.75
U10_1: G4.3 RP1.7 U10.1 U10.19 | length 11433.2
  Top Layer w10: U10.1@7056.2,5105.19 7205,5105.19 7255,5155.19 7470,5155.19 7570,5055.19 8170,5055.19 8210,5095.19 v1(8210,5175.19) ; G4.3@10722.3,3605.2 10790,3605.2 10840,3555.2 11115,3555.2 11155,3595.2 11155,4060.2 11200,4105.19 RP1.7@11312.91,4105.23
  Bottom Layer w10: U10.1@7056.2,5105.19 7165,5105.19 7265,5005.19 U10.19@7356.2,5005.19 ; v1(8210,5175.19) 8220,5185.19 8220,5205.19 8220,6830.19 8260,6870.19 11915,6870.19 11940,6845.19 11940,4285.19 11910,4255.19 11660,4255.19 11560,4255.19 11410,4105.19 RP1.7@11312.91,4105.23
U11_1: G3.8 G3.9 G4.2 G4.13 G5.3 U9.1 U11.1 | length 13936.9
  Top Layer w10: U11.1@7646.7,5105.19 7705,5105.19 7855,5255.19 8125,5255.19 8150,5255.19 8180,5225.19 v1(8180,5205.19) ; G3.9@10432.43,4205.2 G3.8@10432.43,4105.2 10389.99,4105.19 10360,4075.2 10360,4045.2 10360,3775.2 10380,3755.2 10530,3755.2 10580,3705.2 G4.2@10722.3,3705.2
  Bottom Layer w10: v1(8180,5205.19) 8200,5225.19 8200,6115.19 8160,6155.19 7840,6155.19 7790,6205.19 U9.1@7646.7,6205.19 7646.7,6206.9 7715,6275.19 7715,6850.19 7755,6890.19 11920,6890.19 11960,6850.19 11960,4185.19 11930,4155.19 11510,4155.19 11410,4055.2 11170,4055.2 11130,4015.2 11130,3750.2 11085,3705.2 G4.13@11022.3,3705.2 G4.2@10722.3,3705.2 ; G5.3@8951.33,4498.31 8953.2,4500.19 9065,4500.19 9220,4345.19 9320,4345.19 9410,4345.19 9455,4300.19 9455,4180.19 9480,4155.19 10380,4155.19 10430.01,4105.19 G3.8@10432.43,4105.2
U11_2: CN1.19 U10.17 U11.2 | length 4721.6
  Bottom Layer w10: U10.17@7356.2,4805.19 7446.72,4805.19 U11.2@7646.7,5005.19 7785,5005.19 7835,4955.19 8035,4955.19 8167.3,4955.19 8265,4857.49 8265,2745.2 8265,2325.2 8240,2300.2 7765,2300.2 7740,2275.2 7740,2035.19 7740,1935.19 7740,1920.19 7690,1870.19 CN1.19@7689.99,1705.19
U11_5: CN1.20 pad.26 U10.15 U11.5 | length 4368.5
  Top Layer w10: U11.5@7646.7,4705.19 7810,4705.19 7860,4655.19 8080.7,4655.19 v1(8135,4655.19) ; CN1.20@7689.99,1705.19 pad.26@7690,1957.75
  Bottom Layer w10: U10.15@7356.2,4605.19 7450,4605.19 7550,4705.19 U11.5@7646.7,4705.19 ; pad.26@7690,1957.75 7690,2295.2 7715,2320.2 8220,2320.2 8245,2345.2 8245,2730.2 ; v1(8135,4655.19) 8140,4655.19 8245,4550.19 8245,2726.87
U11_6: CN1.21 U10.13 U11.6 | length 4334.3
  Top Layer w10: U11.6@7646.7,4605.19 7810,4605.19 7860,4555.19 v1(8115,4555.19)
  Bottom Layer w10: U10.13@7356.2,4405.19 7400,4405.19 7600,4605.19 U11.6@7646.7,4605.19 ; CN1.21@7589.99,1705.19 7590,1870.19 7640,1920.19 7640,1935.19 7640,2015.19 7640,2315.2 7665,2340.2 8200,2340.2 8225,2365.2 8225,2720.2 8225,4445.19 v1(8115,4555.19)
U11_9: CN1.22 pad.22 U10.11 U11.9 | length 4270.7
  Top Layer w10: U10.11@7356.2,4205.19 7455,4205.19 7555,4305.19 U11.9@7646.7,4305.19 7765,4305.19 7815,4355.19 7990,4355.19 v1(8115,4480.19) ; CN1.22@7589.99,1705.19 pad.22@7590,1957.75
  Bottom Layer w10: pad.22@7590,1957.75 7590,2335.2 7615,2360.2 8180,2360.2 8205,2385.2 8205,2725.2 8205,4390.19 v1(8115,4480.19)
U11_12: CN1.23 U10.2 U11.12 | length 5188.5
  Top Layer w10: U10.2@7056.2,5005.19 7210,5005.19 7260,5055.19 7435,5055.19 7535,4955.19 v1(7730,4955.19)
  Bottom Layer w10: CN1.23@7489.99,1705.19 7490,1870.19 7540,1920.19 7540,1945.19 7540,2015.19 7540,2355.2 7565,2380.2 8160,2380.2 8185,2405.2 8185,4370.19 8130,4425.19 8055,4425.19 8020,4390.19 8020,4350.19 7975,4305.19 U11.12@7946.7,4305.19 7941.72,4310.19 7810,4310.19 7730,4390.19 v1(7730,4955.19)
U11_15: CN1.24 pad.21 U10.4 U11.15 | length 4875.4
  Top Layer w10: U10.4@7056.2,4805.19 7190,4805.19 7240,4755.19 7460,4755.19 7560,4655.19 7810,4655.19 7860,4605.19 U11.15@7946.7,4605.19 8160,4605.19 8185,4580.19 8185,4400.19 8160,4375.19 v1(8075,4375.19) ; CN1.24@7489.99,1705.19 pad.21@7490,1957.75
  Bottom Layer w10: pad.21@7490,1957.75 7490,2375.2 7515,2400.2 8140,2400.2 8165,2425.2 8165,2720.2 8165,4285.19 v1(8075,4375.19)
U11_16: CN1.25 U10.6 U11.16 | length 5137.3
  Top Layer w10: v1(7590,4755.19) 7810,4755.19 7860,4705.19 U11.16@7946.7,4705.19 8195,4705.19 8215,4685.19 8215,4310.19 8190,4285.19 v1(8035,4285.19)
  Bottom Layer w10: U10.6@7056.2,4605.19 7205,4605.19 7255,4655.19 7450,4655.19 7550,4755.19 v1(7590,4755.19) ; CN1.25@7389.99,1705.19 7390,1870.19 7440,1920.19 7440,1935.19 7440,2020.19 7440,2395.2 7465,2420.2 8120,2420.2 8145,2445.2 8145,4175.19 v1(8035,4285.19)
U11_19: CN1.26 pad.20 U10.8 U11.19 | length 5796.3
  Top Layer w10: v1(7140,4555.19) 7195,4610.19 7195,4700.19 v1(7140,4755.19) ; CN1.26@7389.99,1705.19 pad.20@7390,1957.75 ; U11.19@7946.7,5005.19 8000,5005.19 8240,4765.19 8240,4725.19 8240,4230.19 8215,4205.19 v1(8015,4205.19)
  Bottom Layer w10: U10.8@7056.2,4405.19 7140,4488.99 v1(7140,4555.19) ; v1(7140,4755.19) 7240,4855.19 7405,4855.19 7605,5055.19 7785,5055.19 7835,5005.19 U11.19@7946.7,5005.19 ; pad.20@7390,1957.75 7390,2415.2 7415,2440.2 8100,2440.2 8125,2465.2 8125,2660.2 8125,4025.2 8125,4095.2 v1(8015,4205.19)
U12_4: G2.6 U12.4 | length 13057.9
  Top Layer w10: v1(6380,6310.19) 6380,5690.19 U12.4@6465,5605.19 ; G2.6@9541.8,3305.2 9675,3305.2 9725,3255.2 v1(11100,3255.2)
  Bottom Layer w10: v1(6380,6310.19) 6380,6900.19 6410,6930.19 7190,6930.19 11930,6930.19 12000,6860.19 12000,3285.2 11970,3255.2 v1(11100,3255.2)
U12_6: G3.6 U12.6 | length 15091.4
  Top Layer w10: v1(6320,6305.19) 6320,5550.19 U12.6@6465,5405.19 ; G3.6@10132.43,4205.2 10215,4205.19 10245,4235.19 10245,4575.19 10245,4835.19 10255,4845.19 11560,4845.19 11680,4725.19 11680,3245.2 11680,3240.2 v1(11645,3205.2)
  Bottom Layer w10: v1(6320,6305.19) 6320,6920.19 6350,6950.19 11935,6950.19 12020,6865.19 12020,3320.2 12020,3230.2 11995,3205.2 v1(11645,3205.2)
U13_4: G2.8 U13.4 | length 14259.4
  Top Layer w10: v1(6290,6335.19) 6290,6185.19 6280,6175.19 6280,4950.19 6410,4820.19 6410,4525.19 6430,4505.19 U13.4@6465,4505.19 ; G2.8@9841.8,3205.2 9945,3205.2 9995,3155.2 v1(11100,3155.2)
  Bottom Layer w10: v1(6290,6335.19) 6290,6940.19 6320,6970.19 11940,6970.19 12040,6870.19 12040,3180.2 12015,3155.2 11985,3155.2 v1(11100,3155.2)
U13_6: G3.2 U13.6 | length 16436
  Top Layer w10: v1(6260,6305.19) 6260,4935.19 6390,4805.19 6390,4330.19 6415,4305.19 U13.6@6465,4305.19 ; G3.2@10132.43,4605.2 10185,4657.76 10185,4705.19 10185,4860.19 10230,4905.19 11550,4905.19 11625,4980.19 11660,4980.19 11700,4940.19 11700,3140.2 v1(11680,3120.2)
  Bottom Layer w10: v1(6260,6305.19) 6260,6960.19 6290,6990.19 11945,6990.19 12060,6875.19 12060,3210.2 12060,3145.2 12035,3120.2 v1(11680,3120.2)
pads on no net: CN1.1 CN1.2 CN1.9 CN1.40 CN1.51 CN1.52 CN1.53 CN1.54 CN1.55 CN1.56 M1. M2. M3. M4. M5. M6. M7. M8. U12.3 U13.3
copper on no net: | length 0.1

## Polygon pours and split planes (outlines as drawn)
+5V on Mid-Layer 2 (solid): 5415,7865.19 12125,7865.19 12125,7600.19 12175,7550.19 12440,7550.19 12440,2020.19 8710,2020.19 8660,1970.19 8660,1840.19 5630,1840.19 5630,1970.19 5580,2020.19 1595,2020.19 1595,6445.19 1860,6445.19 1910,6495.19 1910,6760.19 1965,6760.19 5150,6760.19 5365,6760.19 5415,6810.19 5415,7100.19
GND on Mid-Layer 1 (solid): 1595,6445.19 1595,2020.19 2025,2020.19 3070,2020.19 5220,2020.19 5430,2020.19 5580,2020.19 5605,1995.19 5630,1970.19 5630,1840.19 6240,1840.19 7335,1840.19 8660,1840.19 8660,1970.19 8685,1995.19 8710,2020.19 9050,2020.19 9450,2020.19 11590,2020.19 12440,2020.19 12440,2345.2 12440,4375.19 12440,7550.19 12280,7550.19 12175,7550.19 12150,7575.19 12125,7600.19 12125,7705.19 12125,7865.19 5415,7865.19 5415,6810.19 5390,6785.19 5365,6760.19 4950,6760.19 4460,6760.19 3495,6760.19 1910,6760.19 1910,6600.19 1910,6495.19 1885,6470.19 1860,6445.19 1820,6445.19 1755,6445.19

## Silkscreen, mask and mechanical layers (free items; w line width, h text height)
Top Overlay:
  lines w10: 1839.65,2648.7 2489.26,2648.7 2489.26,6457.74 1839.65,6457.74 1839.65,2648.7 ; 2823.9,2648.7 3473.51,2648.7 3473.51,6457.74 2823.9,6457.74 2823.9,2648.7 ; 3808.15,2648.7 4457.76,2648.7 4457.76,6457.74 3808.15,6457.74 3808.15,2648.7 ; 4792.4,2648.7 5442.01,2648.7 5442.01,6457.74 4792.4,6457.74 4792.4,2648.7
  lines w10 net S$1069934: 8860,6985.19 8860,7310.19 8860,7315.19 8865,7315.19 11995,7315.19 11995,6985.19 8860,6985.19
  lines w10 net S$1070163: 6245,6985.19 6245,7245.19 8250,7245.19 8250,6985.19 6245,6985.19
  lines w10 net S$1070305: 8855,7345.19 9665,7345.19 9665,7545.19 8855,7545.19 8855,7345.19
  text "LISA 2MB RAM CARD" at 5490,7606.14 h118.11
  text "RP3-7: 330" at 8875,7435.67 h59.05
  text "RESISTOR NETWORKS ARE ISOLATED" at 9940,7385.67 h59.05
  text "C1-5: 10UF/35V" at 8950.52,7355.67 h59.05 r1
  text "RP2: 47" at 8880,7200.67 h59.05
  text "G7: 74S10" at 9655,7200.67 h59.05
  text "G10: 74LS04" at 10290,7200.67 h59.05
  text "U2: 74S139" at 10995,7200.67 h59.05
  text "U12: 74LS280" at 6270,7135.67 h59.05
  text "U8: 74LS244" at 7015,7135.67 h59.05
  text "U9: 74LS373" at 7685,7135.67 h59.05
  text "U4: 74S157" at 8935,7125.67 h59.05
  text "G6: 74S10" at 9655,7125.67 h59.05
  text "G8: 74S00" at 10320,7125.67 h59.05
  text "G9: 74S00" at 10995,7125.67 h59.05
  text "U13: 74LS280" at 6270,7055.67 h59.05
  text "U10: 74LS244" at 6985,7055.67 h59.05
  text "U11: 74LS373" at 7675,7055.67 h59.05
  text "G5: 74S00" at 8935,7050.67 h59.05
  text "G1: 74S32" at 9675,7050.67 h59.05
  text "G3: 74S02" at 10320,7050.67 h59.05
  text "G11: 74ALS20" at 10985,7050.67 h59.05
  text "RP1: 1K" at 11700,7050.67 h59.05
  text "U6: 74S373" at 6300,6975.67 h59.05
  text "U7: 74S373" at 7015,6975.67 h59.05
  text "U5: 74S373" at 7685,6975.67 h59.05
  text "U3: 74LS375" at 8940,6975.67 h59.05
  text "G2: 74S132" at 9650,6975.67 h59.05
  text "U1: 74S109" at 10345,6975.67 h59.05
  text "G4: 74S03" at 10990,6975.67 h59.05
  text "E.G. - IF ALL FOUR PAIRS USED, MEM2-4 WOULD BE JUMPERED" at 12060.47,6765.19 h59.05 r270
  text "NO JUMPER REQUIRED FOR MEM1; INSTALL JUMPERS ON ALL SELECT HEADERS WHERE RAM IS INSTALLED" at 12155.47,6765.19 h59.05 r270
  text "MEM1 MUST HAVE SIMMS POPULATED AT A MINIMUM" at 12250.47,6765.19 h59.05 r270
  text "MEM4" at 2030,6610.19 h80
  text "MEM3" at 3020,6610.19 h80
  text "MEM2" at 4005,6610.19 h80
  text "MEM1" at 4985,6610.19 h80
  text "SELECT" at 11350,5847.69 h45
Document:
  lines w0.1: 7016.79,4729.39 7016.81,4729.41